# EAGLE board avr_programming_shield_Zif-Bill14 (EAGLE 6.4)
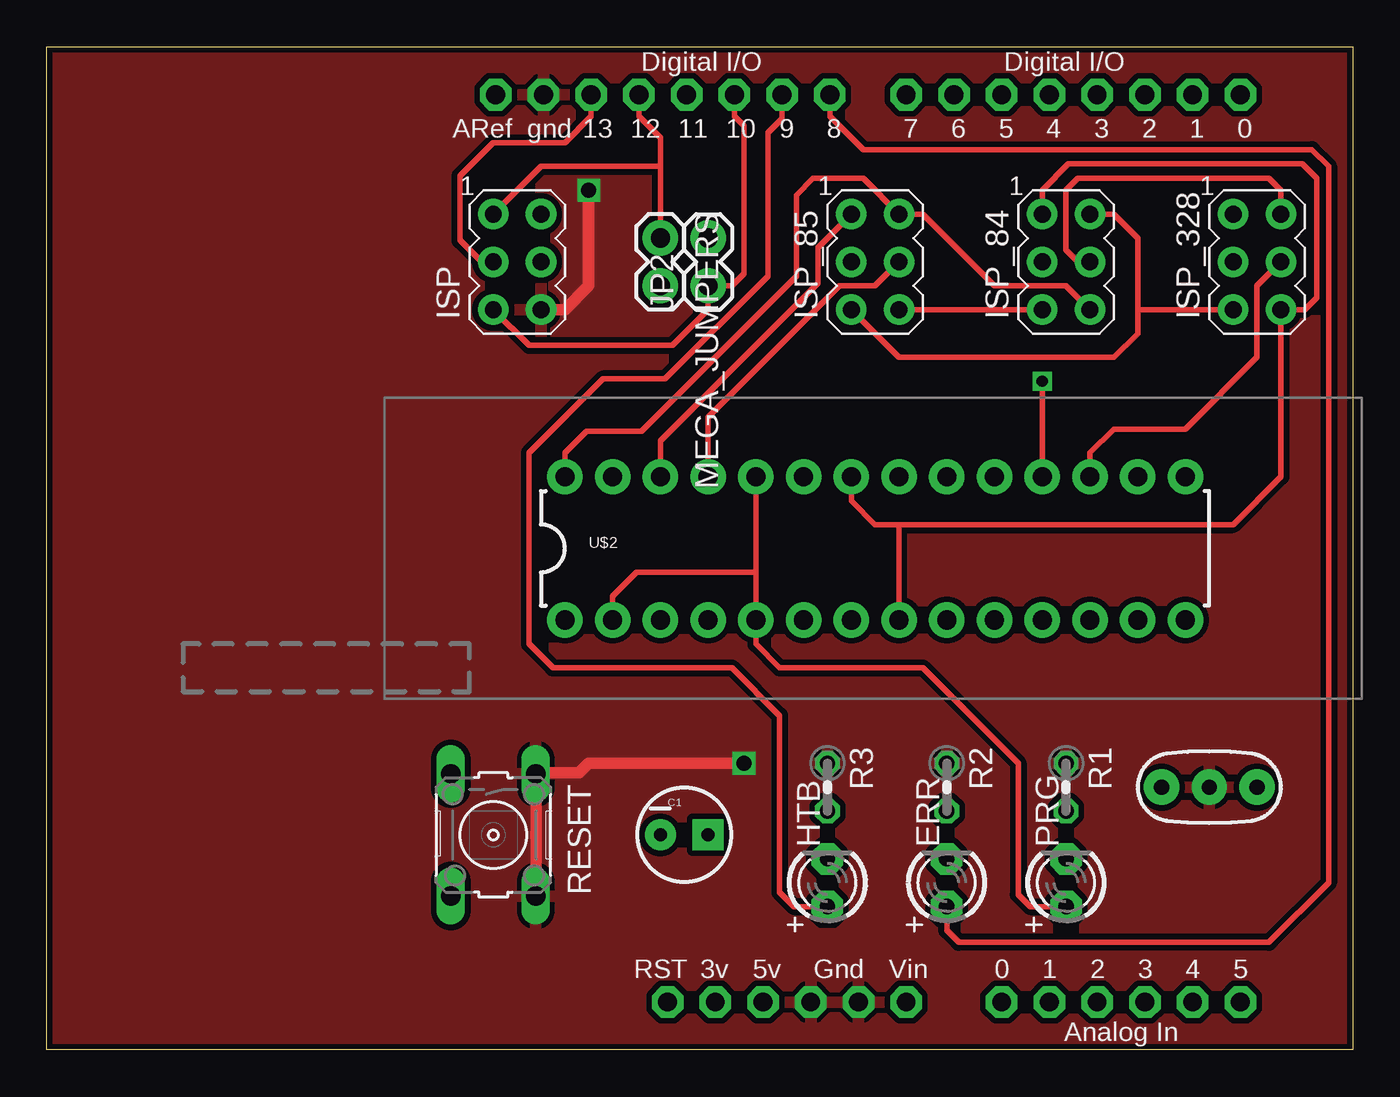
[diagram p0: board, top side]
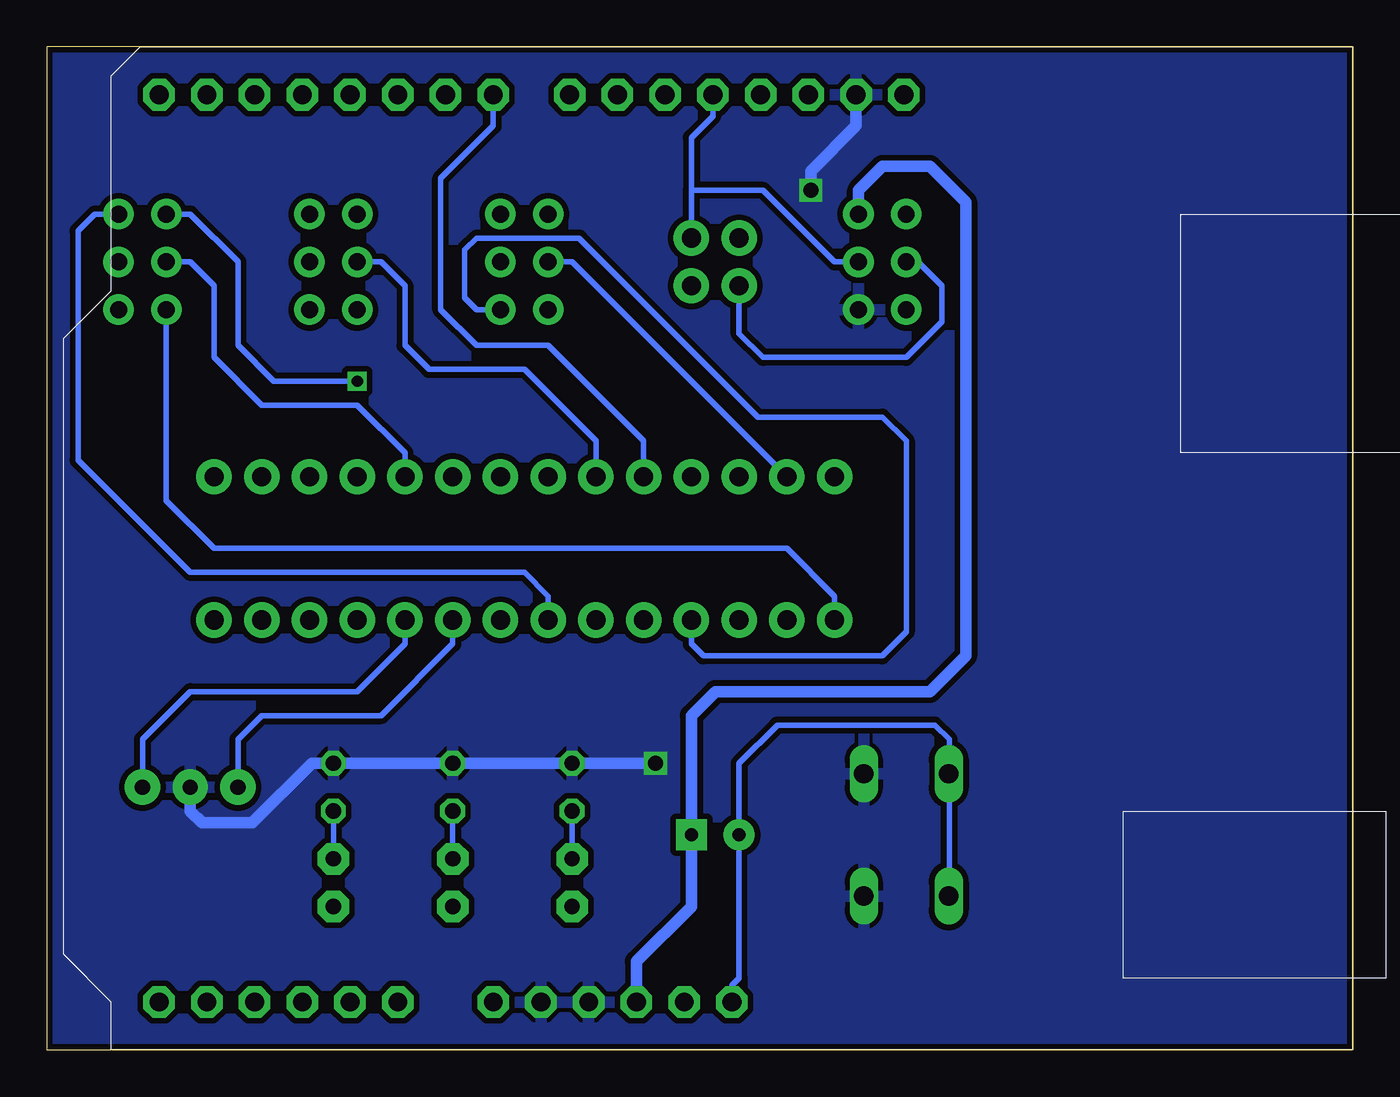
[diagram p1: board, bottom side, seen from below]

Size 69.47 x 53.34 mm. Coordinates in mm from the lower left corner, seen from the top.
Outline: 0,53.34 69.47,53.34 69.47,0 0,0 0,53.34
Copper layers (1*16): Top 0.035mm / dielectric 1.5mm / Bottom 0.035mm
Design rules "default *": minimum track width 12mil, minimum drill 19mil, track to track 12mil, track to pad 12mil, pad to pad 12mil, via to via 12mil, smd to smd 0mil, copper to edge 12mil, drill to drill 8mil, minimum pad ring 10mil, minimum via ring 8mil, stop-mask expansion 4mil, vias tented up to drill 20mil, thermal gap 10mil
Net classes: 1 power: width 0.61 mm

## Footprints (pad centres in the part's own frame; a part is rotated, then mirrored left to right if it is on the bottom)
RESONATOR-PTH = drill 0.8 pad 1.88: 1 -2.54,0; 2 0,0; 3 2.54,0
CPOL-RADIAL-10UF-25V = drill 0.7 pad 1.651 square: 1 1.27,0 | drill 0.7 pad 1.651: 2 -1.27,0
LED3MM = drill 0.813 pad 1.676 octagon: A -1.27,0; K 1.27,0
AVRISP = drill 0.9 pad 1.626: 1 -1.27,2.54; 2 1.27,2.54; 3 -1.27,0; 4 1.27,0; 5 -1.27,-2.54; 6 1.27,-2.54
1X02 = drill 1.016 pad 1.88: 1 0,0; 2 2.54,0
0204V = drill 0.813 octagon: 1 -1.27,0; 2 1.27,0
B3F-10XX = drill 1.016 long: 1 -3.251,2.261; 2 3.251,2.261; 3 -3.251,-2.261; 4 3.251,-2.261
ARDUINO-NOHOLE = drill 1 pad 1.676 octagon: 3V 35.56,2.54; 5V 38.1,2.54; A0 50.8,2.54; A1 53.34,2.54; A2 55.88,2.54; A3 58.42,2.54; A4 60.96,2.54; A5 63.5,2.54; AREF 23.876,50.8; D0 63.5,50.8; D1 60.96,50.8; D2 58.42,50.8; D3 55.88,50.8; D4 53.34,50.8; D5 50.8,50.8; D6 48.26,50.8; D7 45.72,50.8; D8 41.656,50.8; D9 39.116,50.8; D10 36.576,50.8; D11 34.036,50.8; D12 31.496,50.8; D13 28.956,50.8; GND 26.416,50.8; GND1 43.18,2.54; GND2 40.64,2.54; RESET 33.02,2.54; VIN 45.72,2.54
DIL28-3-ZIF_SOCKET = drill 1.016 pad 1.88: 1 -16.51,-3.81; 2 -13.97,-3.81; 3 -11.43,-3.81; 4 -8.89,-3.81; 5 -6.35,-3.81; 6 -3.81,-3.81; 7 -1.27,-3.81; 8 1.27,-3.81; 9 3.81,-3.81; 10 6.35,-3.81; 11 8.89,-3.81; 12 11.43,-3.81; 13 13.97,-3.81; 14 16.51,-3.81; 15 16.51,3.81; 16 13.97,3.81; 17 11.43,3.81; 18 8.89,3.81; 19 6.35,3.81; 20 3.81,3.81; 21 1.27,3.81; 22 -1.27,3.81; 23 -3.81,3.81; 24 -6.35,3.81; 25 -8.89,3.81; 26 -11.43,3.81; 27 -13.97,3.81; 28 -16.51,3.81

## Placement (x,y rotation side)
16MHZ  RESONATORPTH  [RESONATOR-PTH]  61.85,13.97 0 top
C1  10uF  [CPOL-RADIAL-10UF-25V]  33.91,11.43 0 top
E$1  [OSHWLOGO_TOL_0.2]  79.12,25.78 0 top  (outside the outline)
ERR  [LED3MM]  47.88,8.89 90 top
HTB  [LED3MM]  41.53,8.89 90 top
ISP  AVRISP-6  [AVRISP]  25.02,41.91 0 top
ISP_84  AVRISP-6  [AVRISP]  54.23,41.91 0 top
ISP_85  AVRISP-6  [AVRISP]  44.07,41.91 0 top
ISP_328  AVRISP-6  [AVRISP]  64.39,41.91 0 top
JP2  [1X02]  35.18,40.64 90 top
MEGA_JUMPERS  [1X02]  32.64,43.18 270 top
PRG  [LED3MM]  54.23,8.89 90 top
R1  [0204V]  54.23,13.97 270 top
R2  [0204V]  47.88,13.97 270 top
R3  [0204V]  41.53,13.97 270 top
RESET  [B3F-10XX]  23.75,11.43 270 top
U$1  ARDUINO-NOHOLE  [ARDUINO-NOHOLE]  0,0 0 top
U$2  ZIFSOCKET-28-3ZIFFSOCKET-28-3  [DIL28-3-ZIF_SOCKET]  44.07,26.67 0 top

## Library data of the parts
16MHZ C1 JP2 MEGA_JUMPERS = SparkFun
E$1 ERR HTB ISP ISP_84 ISP_85 ISP_328 PRG R1-R3 U$1 = adafruit
RESET = switch-omron
U$2 = SparkFun-Connectors

## Nets
3V: U$1.3V
COMMON_D3: PRG.A U$1.D7 U$2.2 U$2.5 U$2.24
GND [power]: 16MHZ.2 ISP.6 R1.1 R2.1 R3.1 RESET.1 RESET.2 U$1.GND U$1.GND1 U$1.GND2
N$1: ISP_328.4 U$2.17
N$2: ISP.3 MEGA_JUMPERS.2 U$1.D13
N$3: ISP.1 MEGA_JUMPERS.1 U$1.D12
N$4: ISP_328.1 U$2.18
N$5: ISP.5 JP2.1 U$1.D10
N$7: ISP_328.3 U$2.19
N$8: PRG.K R1.2
N$9: ERR.K R2.2
N$10: HTB.K R3.2
N$11: ISP_84.4 ISP_328.2 U$2.7
N$12: ISP.4 JP2.2 U$1.D11
N$13: ISP_84.2 ISP_85.5 ISP_328.5 U$2.1
N$15: ISP_84.3 U$2.23
N$16: ISP_84.6 ISP_85.2 U$2.28
N$17: HTB.A U$1.D9
N$18: ISP_84.5 ISP_85.6 U$2.4
N$19: ISP_85.4 U$2.25
N$20: ISP_85.1 U$2.26
N$21: ISP_85.3 U$2.27
N$22: 16MHZ.1 U$2.9
N$24: ERR.A U$1.D8
N$25: 16MHZ.3 U$2.10
N$26: ISP_84.1 ISP_328.6 U$2.8 U$2.22
RESET: C1.2 RESET.3 RESET.4 U$1.RESET
VCC: C1.1 ISP.2 U$1.5V
VIN: U$1.VIN

## Tracks (layer width: path | path; a pad name or v marks a point on that pad's centre or on a via)
COMMON_D3
  Top 0.305: PRG.A 52.32,7.62 51.69,8.26 51.69,15.24 46.61,20.32 38.99,20.32 37.72,21.59 U$2.5 37.72,25.4 | U$2.24 37.72,25.4 | 37.72,25.4 31.37,25.4 30.1,24.13 U$2.2
  Bottom 0.305: U$2.24 37.72,32.38 42.8,37.46 46.61,37.46 48.51,39.37 48.51,46.35 45.72,49.15 U$1.D7
GND  (via drill 0.8)
  Top 0.61: v37.08,15.24 28.83,15.24 28.32,14.73 26.04,14.73 26.04,8.26 | v28.83,45.72 28.83,40.64 27.56,39.37 ISP.6
  Bottom 0.61: 16MHZ.2 61.85,12.7 61.21,12.07 58.55,12.07 55.37,15.24 R1.1 R2.1 R3.1 v37.08,15.24 | U$1.GND 26.42,49.15 28.83,46.74 v28.83,45.72
  pour Bottom: -0.38,53.34 69.47,53.34 69.47,0 -0.38,0
  pour Top: -0.38,53.34 69.47,53.34 69.47,0 -0.38,0
N$1
  Top 0.305: U$2.17 55.5,31.75 56.77,33.02 60.58,33.02 64.39,36.83 64.39,40.64 ISP_328.4
N$2
  Top 0.305: ISP.3 23.11,41.91 21.97,43.05 21.97,46.48 23.75,48.26 27.56,48.26 28.96,49.66 U$1.D13
  Bottom 0.305: ISP.3 23.11,41.91 21.84,40.64 21.84,38.73 23.75,36.83 31.37,36.83 32.64,38.1 MEGA_JUMPERS.2
N$3
  Top 0.305: ISP.1 26.29,46.99 32.64,46.99 | 32.64,46.99 32.64,48.51 31.5,49.66 U$1.D12 | MEGA_JUMPERS.1 32.64,46.99
N$4  (via drill 0.6)
  Top 0.305: U$2.18 v52.96,35.56
  Bottom 0.305: v52.96,35.56 57.4,35.56 59.31,37.46 59.31,41.91 61.85,44.45 ISP_328.1
N$5
  Top 0.305: U$1.D10 36.58,49.66 37.08,49.15 37.08,41.27 36.45,40.64 JP2.1 35.18,39.37 33.27,37.46 25.65,37.46 ISP.5
N$7
  Bottom 0.305: U$2.19 50.42,31.75 52.96,34.29 58.04,34.29 60.58,36.83 60.58,40.64 61.85,41.91 ISP_328.3
N$8
  Bottom 0.305: PRG.K R1.2
N$9
  Bottom 0.305: R2.2 ERR.K
N$10
  Bottom 0.305: R3.2 HTB.K
N$11
  Top 0.305: ISP_328.2 65.66,45.72 65.02,46.35 54.86,46.35 54.23,45.72 54.23,42.54 54.86,41.91 ISP_84.4
  Bottom 0.305: ISP_328.2 66.93,44.45 67.82,43.56 67.82,31.37 61.85,25.4 44.07,25.4 42.8,24.13 U$2.7
N$12
  Bottom 0.305: U$1.D11 34.04,49.66 35.18,48.51 35.18,45.72 | ISP.4 27.56,41.91 31.37,45.72 35.18,45.72 | JP2.2 35.18,45.72
N$13
  Top 0.305: 58.04,39.37 58.04,43.18 56.77,44.45 ISP_84.2 | 58.04,39.37 ISP_328.5 | ISP_85.5 45.34,36.83 56.77,36.83 58.04,38.1 58.04,39.37
  Bottom 0.305: U$2.1 27.56,24.13 30.1,26.67 60.58,26.67 63.12,29.21 ISP_328.5
N$15
  Bottom 0.305: ISP_84.3 51.69,41.91 50.42,40.64 50.42,37.46 49.15,36.2 44.07,36.2 40.26,32.38 U$2.23
N$16
  Top 0.305: ISP_84.6 54.23,40.64 50.42,40.64 46.61,44.45 ISP_85.2 43.43,46.35 40.77,46.35 39.88,45.47 39.88,41.15 31.62,32.89 28.7,32.89 27.56,31.75 U$2.28
N$17
  Top 0.305: U$1.D9 39.12,49.53 38.35,48.77 38.35,41.15 32.89,35.69 29.59,35.69 25.65,31.75 25.65,21.59 26.92,20.32 36.45,20.32 38.99,17.78 38.99,8.38 39.75,7.62 HTB.A
N$18
  Top 0.305: ISP_85.6 ISP_84.5
  Bottom 0.305: ISP_85.6 46.61,39.37 47.24,40 47.24,42.54 46.61,43.18 41.15,43.18 31.62,33.65 25.02,33.65 23.75,32.38 23.75,22.23 25.02,20.96 34.54,20.96 35.18,21.59 U$2.4
N$19
  Top 0.305: ISP_85.4 44.07,40.64 42.16,40.64 35.18,33.65 U$2.25
N$20
  Top 0.305: ISP_85.1 41.02,42.67 41.02,40.77 32.64,32.38 U$2.26
N$21
  Bottom 0.305: ISP_85.3 41.53,41.91 U$2.27
N$22
  Bottom 0.305: 16MHZ.1 59.31,16.51 58.04,17.78 51.69,17.78 47.88,21.59 U$2.9
N$24
  Top 0.305: U$1.D8 41.66,49.66 43.43,47.88 67.31,47.88 68.2,46.99 68.2,8.89 65.02,5.71 48.51,5.71 47.88,6.35 ERR.A
N$25
  Bottom 0.305: 16MHZ.3 64.39,16.51 61.85,19.05 52.96,19.05 50.42,21.59 U$2.10
N$26
  Top 0.305: ISP_84.1 52.96,45.72 54.36,47.12 66.8,47.12 67.56,46.35 67.56,40 66.93,39.37 ISP_328.6 65.66,30.48 63.12,27.94 45.34,27.94 | U$2.22 42.8,29.21 44.07,27.94 45.34,27.94 | U$2.8 45.34,27.94
RESET
  Bottom 0.305: 21.46,14.71 21.46,8.2 RESET.4 | U$1.RESET 33.02,3.43 32.64,3.81 C1.2 32.64,15.24 30.61,17.27 22.23,17.27 21.46,16.51 21.46,14.71 | RESET.3 21.46,14.71
VCC
  Bottom 0.61: ISP.2 26.29,45.72 25.02,46.99 22.48,46.99 20.57,45.08 20.57,20.96 22.48,19.05 33.91,19.05 35.18,17.78 C1.1 35.18,7.62 38.1,4.7 U$1.5V